# Altium PCB Copy of PCB1.PcbDoc
Units mm, origin at the board's own origin, x right, y up, seen from the top; angles counter-clockwise.
Board outline 44.2 x 44.07 mm, 2 copper layers (Top Layer, Bottom Layer); 13 components, 16 nets, 58 pads, 0 vias.
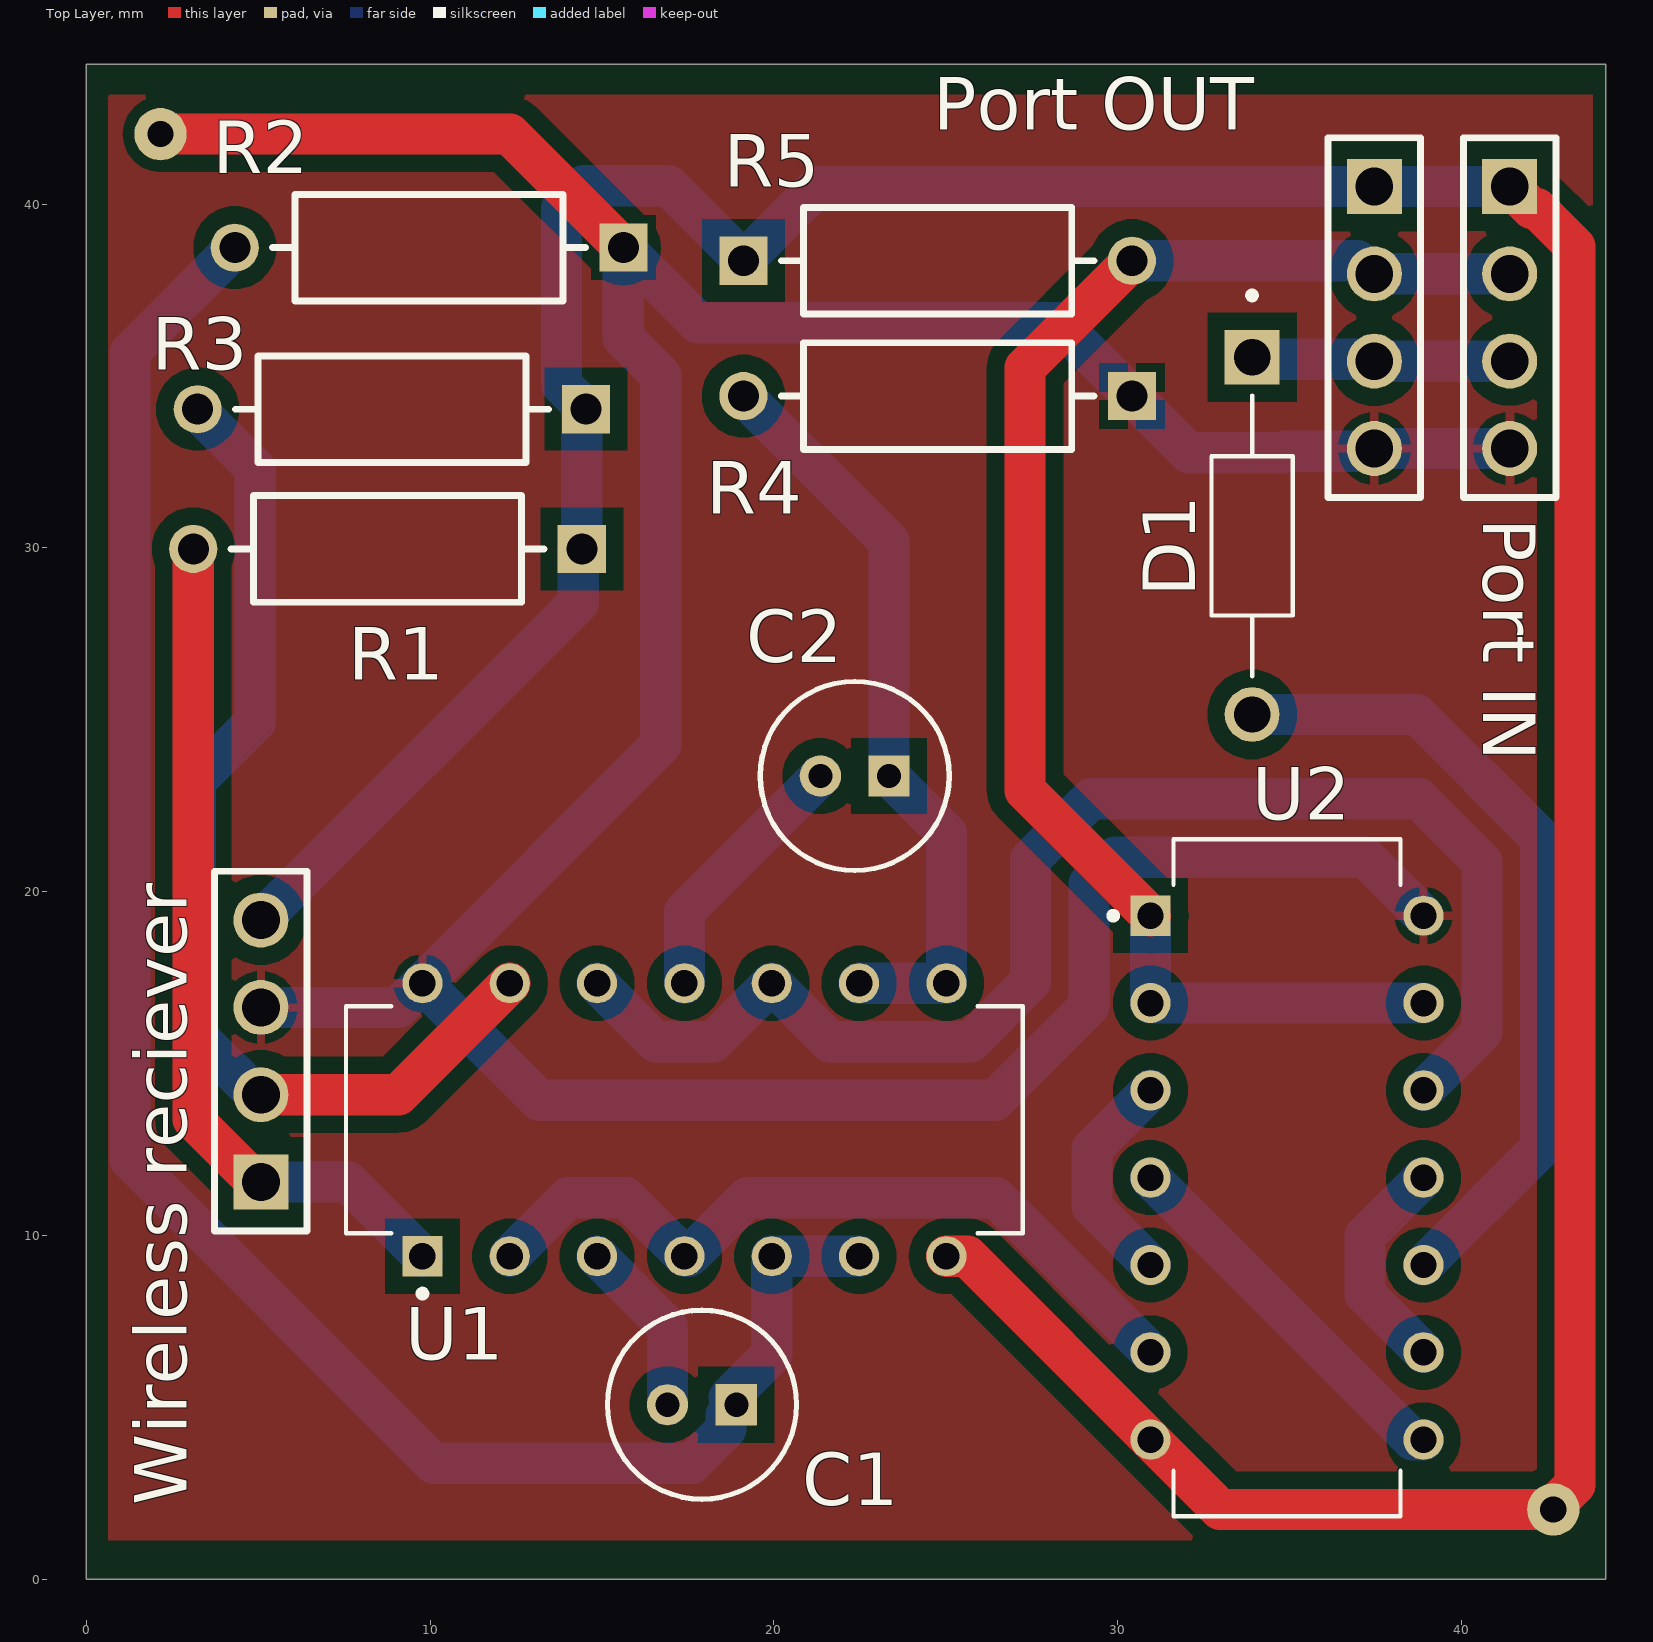
[diagram p0: Top Layer view]
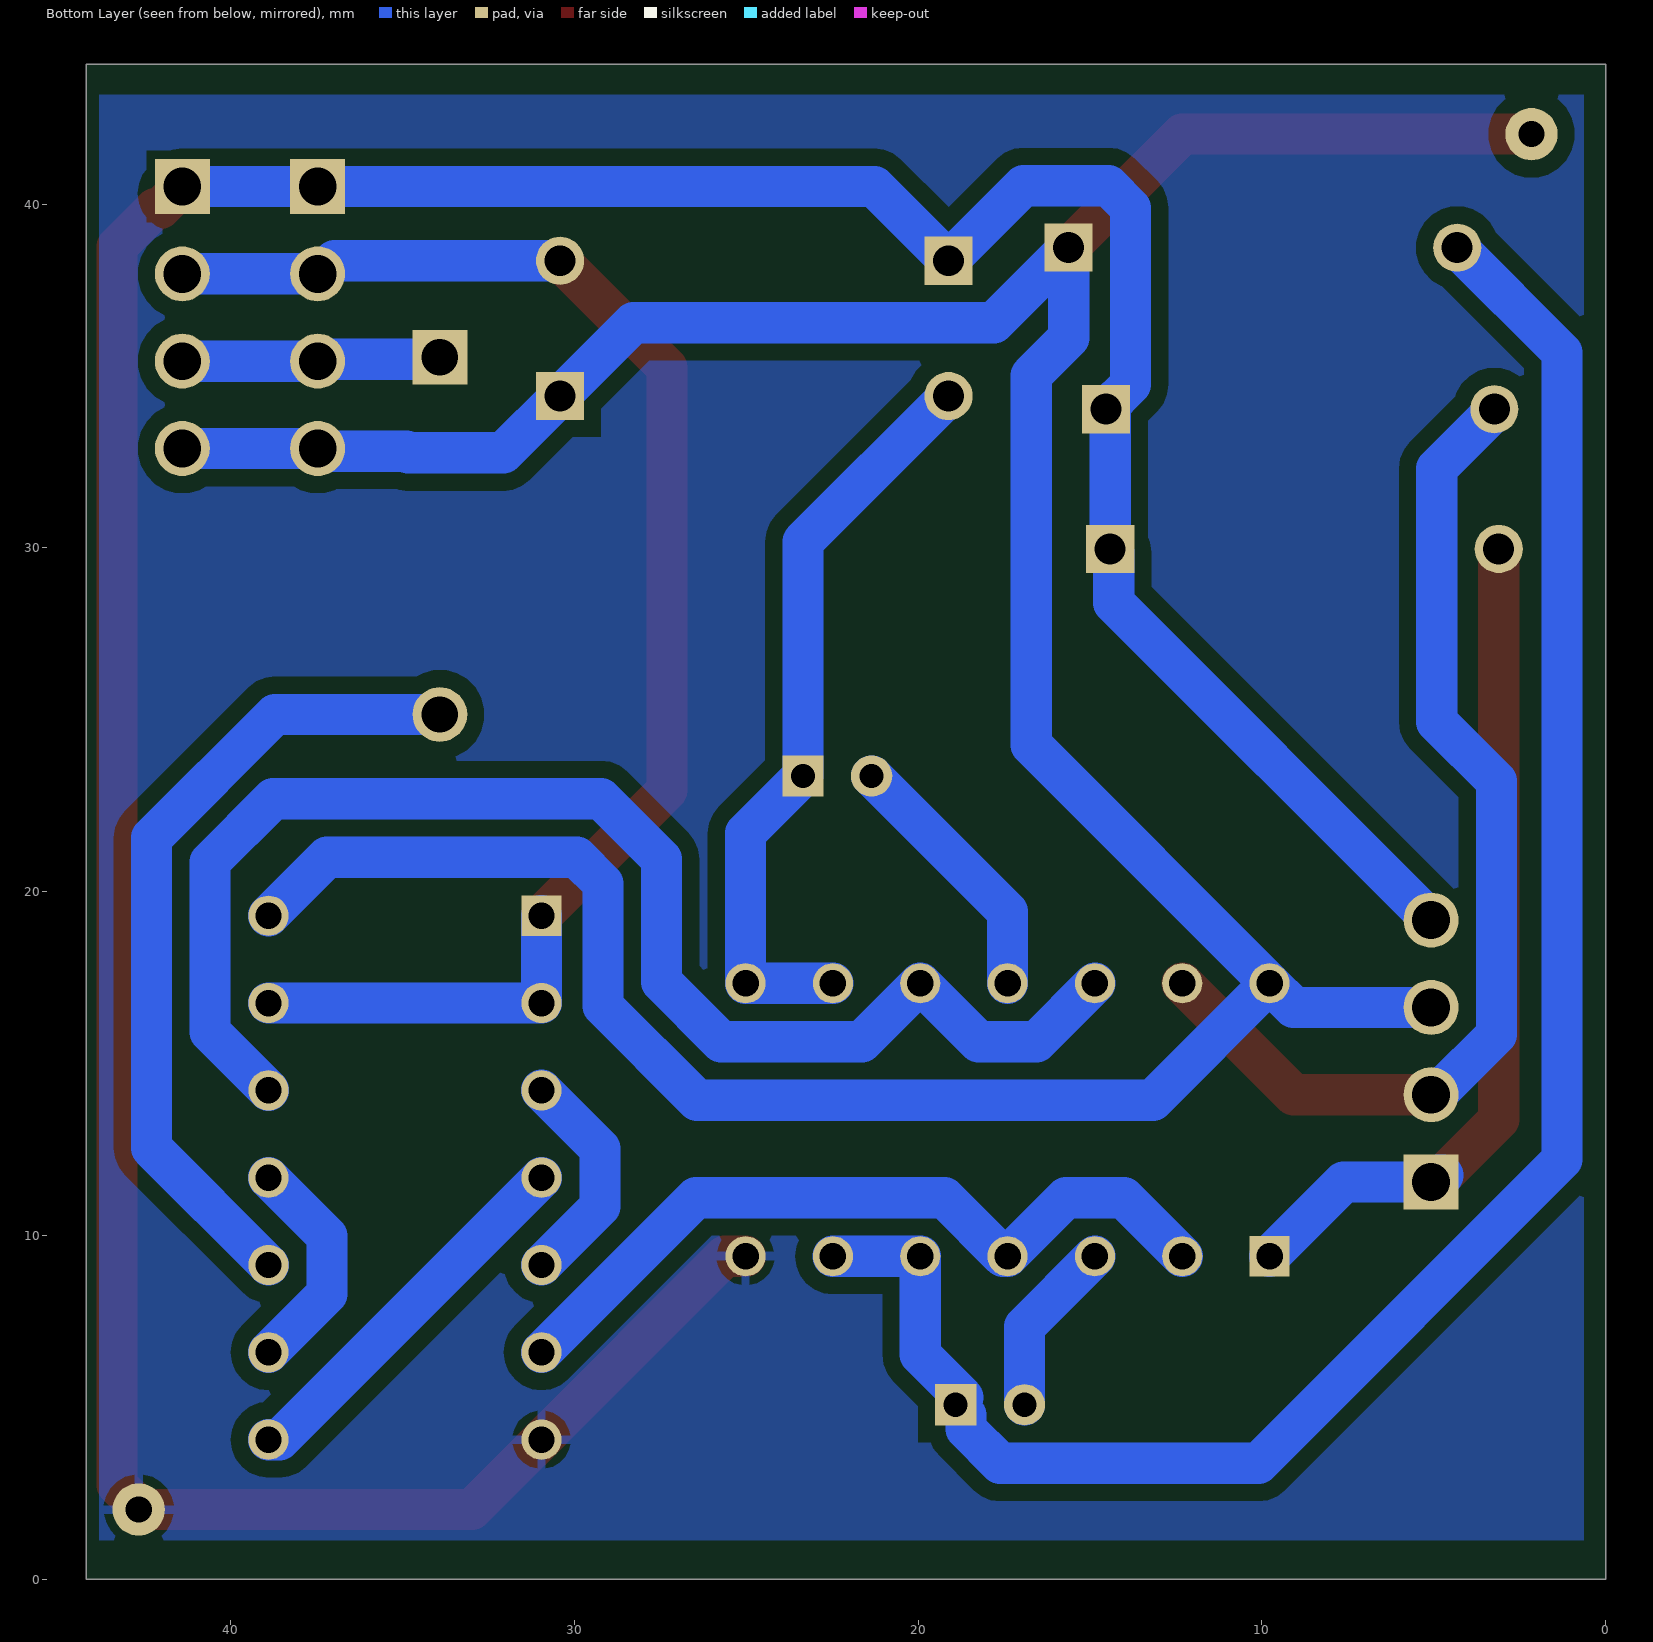
[diagram p1: Bottom Layer view, seen from below]

## Layer stack, top to bottom
Top Solder: solder mask 0.0102, Solder Resist, Dk 3.5
Top Layer: signal copper 0.0356
Dielectric 1: dielectric 0.32, FR-4, Dk 4.8
Bottom Layer: signal copper 0.0356
Bottom Solder: solder mask 0.0102, Solder Resist, Dk 3.5

## Board outline
0,0 44.196,0 44.196,44.069 0,44.069

## Design rules (kind name [scope] priority, off if disabled: settings)
Clearance [All] p1: gap=0.5 ignorepadtopadclearanceinfootprint=FALSE
PolygonConnect [All] p1: connectstyle=Relief reliefconductorwidth=0.254 reliefentries=4 polygonreliefangle="90 Angle" airgapwidth=0.254
RoutingVias [All] p1: holewidth=0.711 width=1.27 viastyle="Through Hole" minholewidth=0.711 minwidth=1.27 maxholewidth=0.711 maxwidth=1.27
SilkToSolderMaskClearance [IsPad] p1: minsilkscreentomaskgap=0.1 clearancetoexposedcopper=TRUE
SolderMaskExpansion [All] p1: expansion=0.102 istentingtop=FALSE
Width [All] p1: maxlimit=1.5 minlimit=0.8 preferedwidth=1.2
29 further rules are at their usual default settings.

## Classes and differential pairs
component class Sheet1: C1 C2 "Port OUT" R1 R2 R3 R4 R5 "Wireless reciever"

## Components (designator, comment, footprint, x,y, rotation, side; value= is the part's Value field where it differs from the comment)
C1 "ECA1CEN330" FP-RAD-TH-D_5_0_5-L_11_1-MFG 17.907,5.08 r180 top
C2 "ECA1CEN330" FP-RAD-TH-D_5_0_5-L_11_1-MFG 22.352,23.368 r180 top
D1 "1N5817-T" DIOAD1039W78L463D236 33.909,30.353 r270 top
"Port IN" "61300411121" 61300411121 41.402,36.703 r270 top
"Port OUT" "61300411121" 61300411121 37.465,36.703 r270 top
R1 "RR01J100KTB" FP-RR01-MFG 8.763,29.972 r180 top
R2 "RR01J100KTB" FP-RR01-MFG 9.971,38.735 r180 top
R3 "RR01J100KTB" FP-RR01-MFG 8.89,34.036 r180 top
R4 "RR01J100KTB" FP-RR01-MFG 24.765,34.417 r180 top
R5 "RR01J100KTB" FP-RR01-MFG 24.765,38.354 r0 top
U1 "CD4001BE" DIP794W45P254L1969H508Q14 17.399,13.368 r90 top
U2 "CD4011BE" DIP794W45P254L1969H508Q14 34.925,11.684 r0 top
"Wireless reciever" "61300411121" 61300411121 5.08,15.367 r90 top

## Footprints (in the part's own frame and the unit in brackets; to place one, negate y for a bottom-side part, rotate by r counter-clockwise, add the part's x,y. Pads: shape width x height; smd on the part's side, far side on the other; paste and mask are expansions set on the pad)
61300411121 [mm] "Pin Header, pitch 2.54 mm, THT, Vertical, single row, 4p"
  rect 1.6x1.6 hole 1.1: 1(-3.81,0)
  round 1.6 hole 1.1: 2(-1.27,0) 3(1.27,0) 4(3.81,0)
  silkscreen extent -5.23,-1.35 5.23,1.35, body extent -5.08,-1.27 5.08,1.27, height 8.57
DIOAD1039W78L463D236 [mm]
  rect 1.59x1.59 / inner round 1.59 / far side rect 1.59x1.59 hole 1.06: 1(-5.197,0)
  round 1.59 hole 1.06: 2(5.197,0)
  silkscreen extent -7.09,-1.18 4.08,1.18, body extent -5.47,-1.35 5.47,1.35, height 2.69
DIP794W45P254L1969H508Q14 [mm]
  rect 1.17x1.17 hole 0.77: 1(-3.97,7.62)
  round 1.17 hole 0.77: 2(-3.97,5.08) 3(-3.97,2.54) 4(-3.97,0) 5(-3.97,-2.54) 6(-3.97,-5.08) 7(-3.97,-7.62) 8(3.97,-7.62) 9(3.97,-5.08) 10(3.97,-2.54) 11(3.97,0) 12(3.97,2.54) 13(3.97,5.08) 14(3.97,7.62)
  silkscreen extent -5.15,-9.84 3.3,9.84
FP-RAD-TH-D_5_0_5-L_11_1-MFG [mm]
  rect 1.2x1.2 hole 0.7 paste-1000 mask+0: 1(-1,0)
  round 1.2 hole 0.7 paste-1000 mask+0: 2(1,0)
  silkscreen extent -2.75,-2.75 2.75,2.75, body extent -2.85,-2.85 2.85,2.85, height 0.25
FP-RR01-MFG [mm]
  rect 1.4x1.4 hole 0.9 paste-1000 mask+0: 1(-5.65,0)
  round 1.4 hole 0.9 paste-1000 mask+0: 2(5.65,0)
  silkscreen extent -4.55,-1.55 4.55,1.55, body extent -6.45,-1.65 6.45,1.65, height 0.25

## Part data
C1 C2: library part CMP-05427-001881-1, "Aluminum Electrolytic Capacitors (Radial Lead Type) 33uF ±20% 16V", Capacitance=33uF, Case/Package=Radial, Max Operating Temperature=105°C, Min Operating Temperature=-40°C, Package Quantity=200, Ripple Current=80mA, Tolerance=20%, Voltage Rating (DC)=16V, Lead Pitch=2mm, Lead/Base Style=Straight, Mount="Through Hole", Packaging="Ammo Pack", RoHS Compliant=Yes, Series=GA, Termination=Radial
D1: "Diode Schottky 20 V 1A Through Hole DO-41", Package="DO-41 Diodes Inc.", Availability="In Stock", Check_prices=https://www.snapeda.com/parts/1N5817-T/Diodes+Inc./view-part/?ref=eda, MF="Diodes Inc.", MP=1N5817-T, Price=None, Purchase-URL=https://pricing.snapeda.com/search/part/1N5817-T/?ref=eda, SnapEDA_Link=https://www.snapeda.com/parts/1N5817-T/Diodes+Inc./view-part/?ref=snap
"Port IN" "Port OUT" "Wireless reciever": library part CMP-1502-01064-1, "THT Vertical Pin Header WR-PHD, Pitch 2.54 mm, Single Row, 4 pins", Contact Resistance=20mOhm, Manufacturer="Wurth Elektronik", Operating Temperature=-40to105degC, Rated Current=3A, Withstanding Voltage=500VAC, Working Voltage=250VAC, Datasheet URL=https://katalog.we-online.de/em/datasheet/6130xx11121.pdf, Gender=Male, Manufacturer URL=http://www.we-online.de, Mounting Technology=THT, Orientation=Vertical, Package Reference=61300411121, Packaging=Bag, Part Number=61300411121, Pin Number=4, Pitch=2.54mm, Publisher=WurthElektronik, Row Number=Single
R1 R2 R3 R4 R5: library part CMP-03212-000008-1, "RES 100K OHM 5% 1W AXIAL", Case/Package=Metal, Max Operating Temperature=155°C, Min Operating Temperature=-55°C, Number of Resistors=1, Package Quantity=5000, Power Rating=1W, Resistance=100kR, Resistor Type="Power resistor", Temperature Coefficient=300ppm/°C, Tolerance=5%, Voltage Rating=350V, Diameter=2.6mm, ELV=Compliant, Length=6.8mm, Mount=Axial, Number of Terminations=2, Packaging="Ammo Pack", RoHS Compliant=Yes, Series=RR, Termination=Axial
U1: "CMOS Quad 2-Input NOR Gate 14-PDIP -55 to 125", Package="PDIP-14 Texas Instruments", Availability=Unavailable, DigiKey-Purchase-URL=https://snapeda.com/shop?store=DigiKey&id=2748659, MF="Texas Instruments", Mouser-Purchase-URL=https://snapeda.com/shop?store=Mouser&id=2748659, MP=CD4001BE, Price=None, SnapEDA_Link=https://www.snapeda.com/parts/CD4001BE/Texas%20Instruments/view-part/2748659/?ref=snap, Texas_Instruments-Purchase-URL=https://snapeda.com/shop?store=Texas+Instruments&id=2748659
U2: Package=None, Availability=Unavailable, MP=CD4011BE, Price=None

## Free pads (board coordinates)
  round 1.524 hole 0.762: 2(42.672,2.032) 3(2.159,42.037)

## Nets (pads, with @x,y where several pads share a name; then routed paths per layer and width w, separated by ;. In a path a pad name is that pad's centre, name@x,y a point inside that pad or via, vN(x,y) a via of type N, cw(c..) or ccw(c..) an arc to the next point about the centre after c; other vN are vias at no path point)
CMD: D1.2 U2.10 | length 23.7
  Bottom Layer w1.2: D1.2 38.707,25.156 42.295,21.568 42.295,12.544 U2.10
D1f: "Wireless reciever.2" R3.2 U1.13 | length 30.9
  Top Layer w1.2: 5.08,14.097 9.078,14.097 U1.13
  Bottom Layer w1.2: R3.2 3.24,33.982 4.913,32.309 4.913,24.946 3.18,23.213 3.18,15.85 4.856,14.174 5.003,14.174 5.08,14.097 4.972,14.097
D2n: "Wireless reciever.1" R1.2 U1.1 | length 25.3
  Top Layer w1.2: R1.2 3.113,13.377 4.733,11.757 4.88,11.757 5.08,11.557
  Bottom Layer w1.2: 4.733,11.757 4.88,11.757 5.08,11.557 7.62,11.557 U1.1
GND: "Port IN.1" "Port OUT.1" "Wireless reciever.4" pad.2 R1.1 R3.1 R5.1 U1.7 U2.7 | length 115.2
  Top Layer w1.2: U1.7 25.621,9.398 U2.7 32.987,2.032 pad.2 42.672,2.12 43.302,2.75 43.302,38.76 42.189,39.873 42.042,39.873 41.402,40.513
  Bottom Layer w1.2: 5.08,19.177 14.313,28.41 14.313,29.872 R1.1 14.413,33.909 R3.1 13.821,34.755 13.821,39.891 14.465,40.535 16.934,40.535 R5.1 21.274,40.513 37.465,40.513 41.402,40.513 41.602,40.313
NetC1_1: C1.1 R2.2 U1.5 U1.6 | length 57.2
  Bottom Layer w1.2: R2.2 1.27,35.684 1.27,12.211 10.101,3.38 17.611,3.38 18.607,4.376 18.607,4.78 C1.1 ; C1.1@18.693,5.293 19.939,6.539 U1.5 U1.6
NetC1_2: C1.2 U1.3 | length 5.2
  Bottom Layer w1.2: U1.3 16.907,7.35 C1.2
NetC2_1: C2.1 R4.2 U1.8 U1.9 | length 22.1
  Bottom Layer w1.2: R4.2 23.352,30.18 C2.1 25.019,21.701 U1.8 U1.9
NetC2_2: C2.2 U1.11 | length 7.7
  Bottom Layer w1.2: U1.11 17.399,19.415 C2.2
NetD1_1: "Port IN.3" "Port OUT.3" D1.1 | length 7.5
  Bottom Layer w1.2: D1.1 33.968,35.491 37.407,35.491 37.465,35.433 41.402,35.433
NetU2_3: U2.3 U2.5 | length 6.5
  Bottom Layer w1.2: U2.5 29.255,10.844 29.255,12.524 U2.3
Off: U2.9 U2.11 | length 6.5
  Bottom Layer w1.2: U2.9 37.195,8.304 37.195,9.984 U2.11
"Off pulse": U1.10 U1.12 U2.12 | length 41
  Bottom Layer w1.2: U1.12 16.559,15.638 18.239,15.638 U1.10 21.639,15.638 25.723,15.638 27.467,17.382 27.467,20.945 29.225,22.704 38.755,22.704 40.595,20.864 40.595,15.924 U2.12
On: U2.4 U2.8 | length 11.1
  Bottom Layer w1.2: U2.4 38.575,4.064 U2.8
"On pulse": U1.2 U1.4 U2.6 | length 22.6
  Bottom Layer w1.2: U1.2 14.019,11.098 15.699,11.098 U1.4 17.535,9.398 19.235,11.098 26.461,11.098 U2.6
Status: "Port IN.2" "Port OUT.2" R5.2 U2.1 U2.2 U2.13 | length 43.5
  Top Layer w1.2: R5.2 27.305,35.244 27.305,22.954 U2.1
  Bottom Layer w1.2: R5.2@30.453,38.392 R5.2 36.976,38.354 37.357,37.973 37.465,37.973 41.402,37.973 ; U2.1 U2.2 U2.13
VCC: "Port IN.4" "Port OUT.4" "Wireless reciever.3" pad.3 R2.1 R4.1 U1.14 U2.14 | length 109.1
  Top Layer w1.2: pad.3 12.319,42.037 R2.1
  Bottom Layer w1.2: 5.08,16.637 9.078,16.637 U1.14 ; U2.14 37.195,21.004 29.929,21.004 29.167,20.241 29.167,16.677 26.427,13.938 13.179,13.938 U1.14 ; 41.402,32.893 37.465,32.893 37.388,32.816 34.88,32.816 34.83,32.766 32.066,32.766 R4.1 28.278,36.554 17.802,36.554 R2.1 15.621,36.111 16.713,35.019 16.713,24.272 U1.14

## Polygon pours and split planes (outlines as drawn)
VCC on Top Layer "VCC_L01_P004" (solid, remove dead copper, pour order 4): 0.508,43.18 0.635,43.053 0.635,1.143 43.815,1.143 43.815,43.18
GND on Bottom Layer "GND_L02_P003" (solid, remove dead copper, pour order 3): 0.635,43.18 0.635,1.143 43.815,1.143 43.815,43.18

## Silkscreen, mask and mechanical layers (free items; w line width, h text height)
Mechanical 1:
  lines w0.254: 0,0 0,44.069 44.196,44.069 44.323,43.942 44.323,-0.127 44.196,0 0,0